# Altium PCB Drone_v1.0.PcbDoc
Units mm, origin at the board's own origin, x right, y up, seen from the top; angles counter-clockwise.
Board outline 99.06 x 99.27 mm, 2 copper layers (Top Layer, Bottom Layer); 82 components, 54 nets, 266 pads, 76 vias.
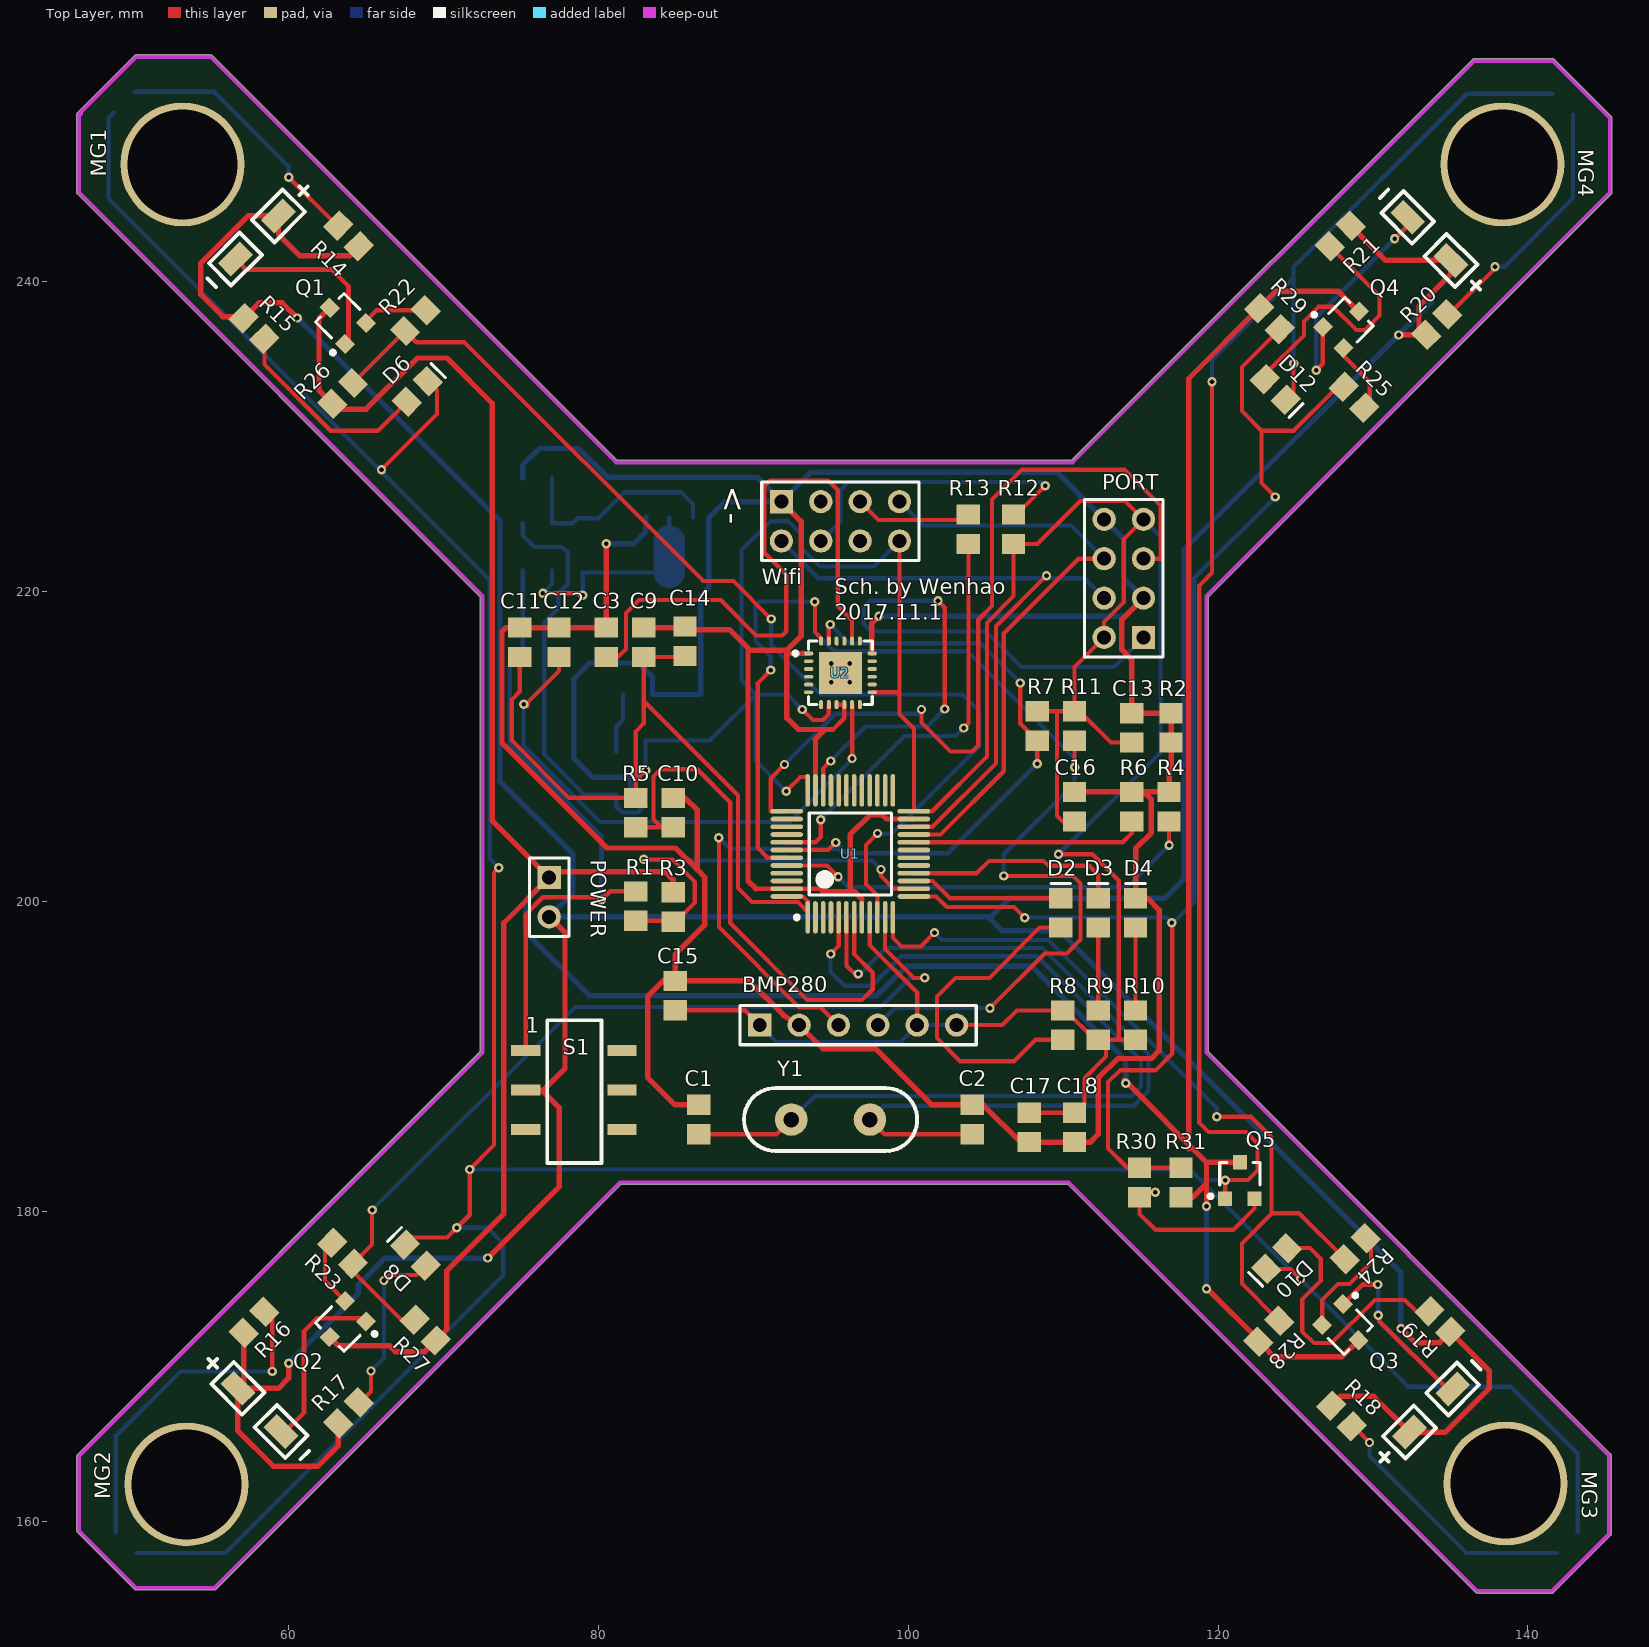
[diagram p0: Top Layer view]
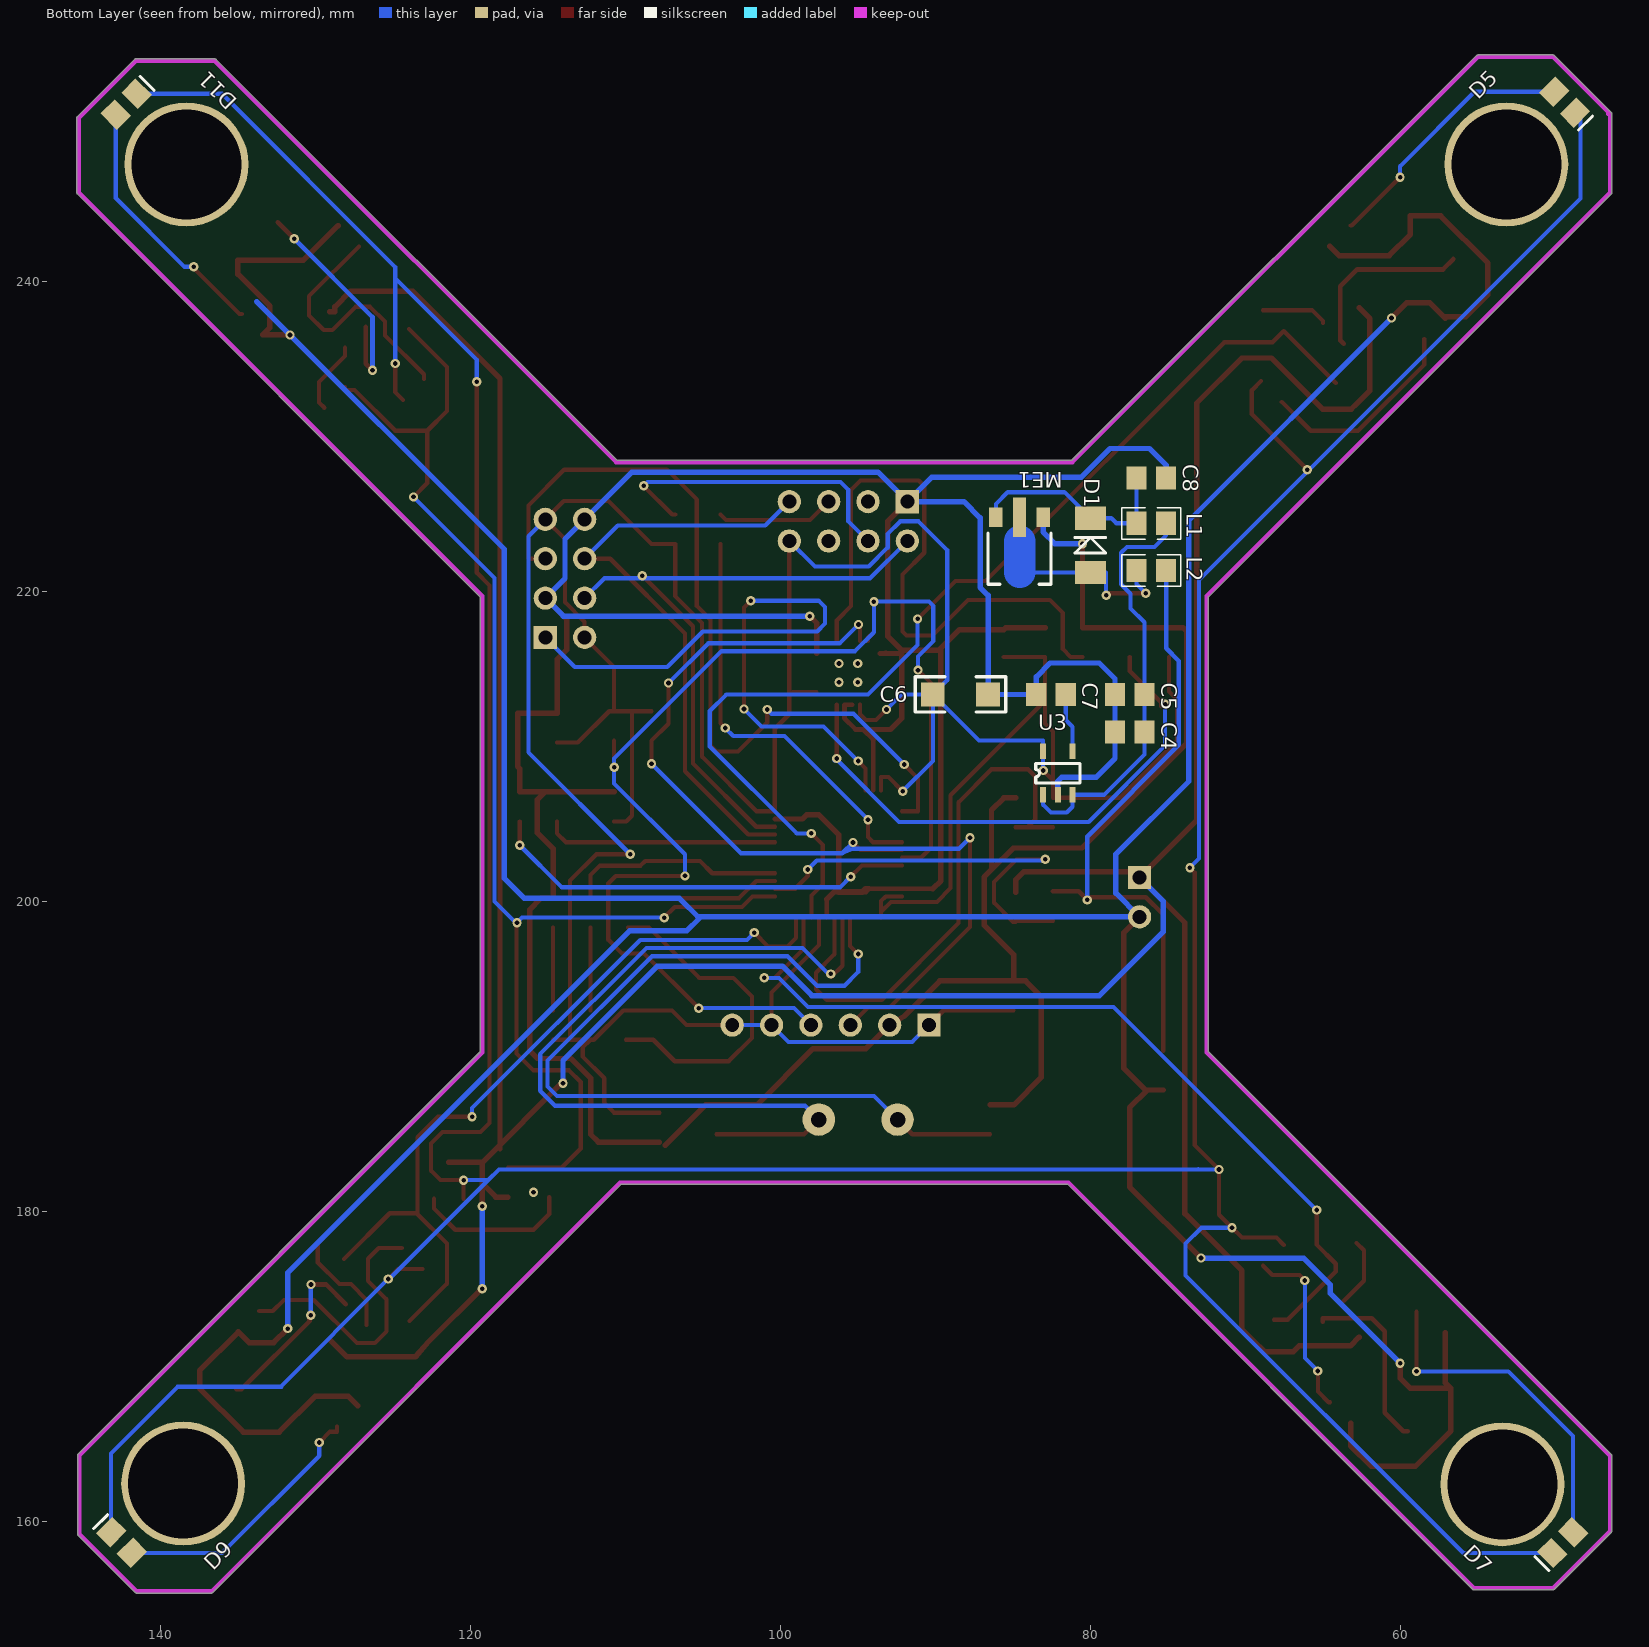
[diagram p1: Bottom Layer view, seen from below]

## Layer stack, top to bottom
Top Layer: signal copper 0.0356
Dielectric: dielectric 0.32, FR-4, Dk 4.8
Bottom Layer: signal copper 0.0356

## Board outline
50.075,155.612 46.392,159.295 46.392,159.294 cw(c46.482,159.385) 46.355,159.385 46.355,164.211 cw(c46.482,164.211) 46.392,164.302 46.392,164.301 72.39,190.299 72.39,219.657 46.392,245.655 46.392,245.654 cw(c46.482,245.745) 46.355,245.745 46.355,250.825 cw(c46.482,250.825) 46.392,250.916 46.392,250.915 50.075,254.598 50.074,254.598 cw(c50.165,254.508) 50.165,254.635 54.991,254.635 cw(c54.991,254.508) 55.082,254.598 55.081,254.598 81.206,228.473 110.564,228.473 136.435,254.344 136.434,254.344 cw(c136.525,254.254) 136.525,254.381 141.605,254.381 cw(c141.605,254.254) 141.696,254.344 141.695,254.344 145.378,250.661 145.378,250.662 cw(c145.288,250.571) 145.415,250.571 145.415,245.745 cw(c145.288,245.745) 145.378,245.654 145.378,245.655 119.38,219.657 119.38,190.299 145.332,164.347 145.331,164.348 cw(c145.242,164.257) 145.369,164.257 145.369,159.177 cw(c145.242,159.177) 145.331,159.087 145.332,159.087 141.649,155.404 141.649,155.405 cw(c141.559,155.494) 141.559,155.367 136.733,155.367 cw(c136.733,155.494) 136.635,155.413 cw(c136.716,155.512) 136.625,155.421 110.31,181.737 81.46,181.737 55.335,155.612 55.336,155.612 cw(c55.245,155.702) 55.245,155.575 50.165,155.575 cw(c50.165,155.702)

## Design rules (kind name [scope] priority, off if disabled: settings)
Clearance [All] p1: gap=0.2
PolygonConnect [All] p1: connectstyle=Relief reliefconductorwidth=0.254 reliefentries=4 polygonreliefangle="90 Angle" airgapwidth=0.254
RoutingVias [All] p1: holewidth=0.711 width=1.27 viastyle="Through Hole" minholewidth=0.711 minwidth=1.27 maxholewidth=0.711 maxwidth=1.27
SolderMaskExpansion [All] p1: expansion=0.102
Width [All] p1: maxlimit=0.4 minlimit=0.27 preferedwidth=0.27 minimp=50.000000 maximp=50.000000 favimp=50.000000
28 further rules are at their usual default settings.

## Classes and differential pairs
component class Drone_v1.0: BMP280 C1 C2 C3 C4 C5 C6 C7 C8 C9 C10 C11 C12 C13 C14 D1 D2 D3 D4 D5 D6 D7 D8 D9 D10 Header L1 L2 ME1 MG1 MG2 MG3 MG4 P1 PORT PORT1 POWER Q1 Q2 Q3 Q4 Q5 R1 R2 R3 R4 R5 R6 R7 R8 R9 R10 R11 R12 R13 R14 R15 R16 R17 R18 R19 R20 R21 R22 R23 R24 R25 R26 R27 R28 S1 U1 U2 U3 Wifi Y1

## Components (designator, comment, footprint, x,y, rotation, side; value= is the part's Value field where it differs from the comment)
BMP280 "BMP280" HDR1X6 90.424,192.024 r0 top (schematic designator P1)
C1 "0402 12pF" 0805-2 86.487,185.928 r90 top
C2 "0402 12pF" 0805-2 104.14,185.928 r270 top
C3 "0402 12pF" 0805-2 80.518,216.728 r270 top
C4 "0402 12pF" 0805-2 77.47,210.947 r0 bottom
C5 "0402 12pF" 0805-2 77.47,213.36 r0 bottom
C6 "Cap Pol" 1206 88.392,213.36 r180 bottom
C7 "0402 12pF" 0805-2 82.55,213.36 r0 bottom
C8 "0402 12pF" 0805-2 76.073,227.33 r180 bottom
C9 "0402 12pF" 0805-2 82.931,216.728 r90 top
C10 "Cap" 0805-2 84.836,205.74 r90 top
C11 "0402 12pF" 0805-2 74.93,216.728 r90 top
C12 "0402 12pF" 0805-2 77.47,216.728 r90 top
C13 "Cap" 0805-2 114.427,211.201 r270 top
C14 "Cap" 0805-2 85.598,216.789 r270 top
C15 "Cap" 0805-2 84.963,193.929 r270 top
C16 "Cap" 0805-2 110.744,206.121 r270 top
C17 "0402 12pF" 0805-2 107.823,185.42 r270 top
C18 "0402 12pF" 0805-2 110.744,185.42 r270 top
D1 "Diode" DIODE-1206 80.01,221.234 r90 bottom
D2 "LED0" LED_0805 109.855,199.263 r90 top
D3 "LED0" LED_0805 112.268,199.263 r90 top
D4 "LED0" LED_0805 114.681,199.263 r90 top
D5 "LED0" LED_0805 49.403,251.587 r225 bottom
D6 "LED0" LED_0805 68.326,232.918 r45 top
D7 "LED0" LED_0805 49.53,158.623 r315 bottom
D8 "LED0" LED_0805 68.199,177.165 r135 top
D9 "LED0" LED_0805 142.538,158.633 r45 bottom
D10 "LED0" LED_0805 123.779,176.957 r225 top
D11 "LED0" LED_0805 142.24,251.46 r135 bottom
D12 "LED0" LED_0805 123.698,233.045 r315 top
L1 "Inductor" 0805-1 76.073,224.409 r180 bottom
L2 "Inductor" 0805-1 76.073,221.361 r180 bottom
ME1 "ME2108A" SOT-89 83.058,224.79 r0 bottom
MG1 "MOTOR AC" Motor 53.975,246.761 r315 top
MG2 "MOTOR AC" Motor 54.229,163.195 r45 top
MG3 "MOTOR AC" Motor 137.749,163.241 r135 top
MG4 "MOTOR AC" Motor 137.541,246.761 r225 top
PORT "PORT" HDR2X4_CEN 115.189,217.043 r90 top (schematic designator PORT1)
POWER "Header 2" HDR1X2 76.835,201.549 r270 top (schematic designator POWER1)
Q1 "SI2302" SOT-23 63.5,237.49 r45 top
Q2 "SI2302" SOT-23 63.5,172.72 r135 top
Q3 "SI2302" SOT-23 128.224,172.512 r225 top
Q4 "SI2302" SOT-23 128.27,237.236 r315 top
Q5 "MOSFET-N" SOT-23 121.412,181.991 r0 top
R1 "Res1" 0805-2 82.423,199.705 r90 top
R2 "Res1" 0805-2 116.967,211.201 r270 top
R3 "Res1" 0805-2 84.836,199.644 r90 top
R4 "Res1" 0805-2 116.84,206.121 r270 top
R5 "Res1" 0805-2 82.423,205.74 r90 top
R6 "Res1" 0805-2 114.427,206.121 r270 top
R7 "Res1" 0805-2 108.331,211.328 r270 top
R8 "Res1" 0805-2 109.982,192.024 r90 top
R9 "Res1" 0805-2 112.268,192.024 r270 top
R10 "Res1" 0805-2 114.681,192.024 r270 top
R11 "Res1" 0805-2 110.744,211.328 r270 top
R12 "Res1" 0805-2 106.807,224.028 r270 top
R13 "Res1" 0805-2 103.886,224.028 r90 top
R14 "Res1" 0805-2 63.881,242.951 r135 top
R15 "Res1" 0805-2 57.785,236.982 r315 top
R16 "Res1" 0805-2 57.785,172.847 r45 top
R17 "Res1" 0805-2 63.881,167.005 r45 top
R18 "Res1" 0805-2 127.97,166.797 r315 top
R19 "Res1" 0805-2 134.32,172.893 r135 top
R20 "Res1" 0805-2 134.112,237.236 r45 top
R21 "Res1" 0805-2 127.889,242.951 r225 top
R22 "Res1" 0805-2 68.199,237.49 r225 top
R23 "Res1" 0805-2 63.5,177.292 r315 top
R24 "Res1" 0805-2 128.859,177.592 r225 top
R25 "Res1" 0805-2 128.778,232.537 r135 top
R26 "Res1" 0805-2 63.5,232.791 r45 top
R27 "Res1" 0805-2 68.834,172.339 r135 top
R28 "Res1" 0805-2 123.271,172.258 r45 top
R29 "Res1" 0805-2 123.317,237.617 r315 top
R30 "Res1" 0805-2 114.935,181.864 r90 top
R31 "Res1" 0805-2 117.602,181.864 r90 top
S1 "Switch" 开关 76.708,183.134 r0 top
U1 "STM32F103C" LQFP-48_M 96.266,203.073 r90 top
U2 "MPU6050" QFN50P400X400X90-24N 95.631,214.757 r0 top
U3 "MIC5219" SOT25-5 83.058,206.883 r90 bottom
Wifi "ESP03" PCBComponent_1 91.821,223.266 r0 top (schematic designator Header1)
Y1 "Micro 3215" XTAL5 92.456,185.928 r0 top

## Footprints (in the part's own frame and the unit in brackets; to place one, negate y for a bottom-side part, rotate by r counter-clockwise, add the part's x,y. Pads: shape width x height; smd on the part's side, far side on the other; paste and mask are expansions set on the pad)
0805-1 [mm] "贴片带丝印"
  rect 1.3x1.5 smd: 1(-0.95,0) 2(0.95,0)
  silkscreen extent -1.91,-1.02 1.9,1.02, body extent -1.14,-0.51 1.14,0.51, height 1
0805-2 [mm] "贴片无丝印"
  rect 1.3x1.5 smd: 1(-0.95,0) 2(0.95,0)
1206 [mil] "贴片元件"
  rect 60x60 smd: 1(-70,0) 2(70,0)
  silkscreen extent -115,-45 115,45, body extent -75,-35 75,35, height 39
DIODE-1206 [mm] "玻璃封装二极管"
  rect 1.5x2 smd: 1(0,0) 2(3.5,0)
  silkscreen extent 1.25,-1 2.25,1
HDR1X2 [mm] "Connector; Header; 2 Position"
  rect 1.5x1.5 hole 0.9: 1(0,0)
  round 1.5 hole 0.9: 2(2.54,0)
  silkscreen extent -1.27,-1.27 3.81,1.27
HDR1X6 [mm] "Connector; Header; 6 Position"
  rect 1.5x1.5 hole 0.9: 1(0,0)
  round 1.5 hole 0.9: 2(2.54,0) 3(5.08,0) 4(7.62,0) 5(10.16,0) 6(12.7,0)
  silkscreen extent -1.27,-1.27 13.97,1.27
HDR2X4_CEN [mm] "Connector; Header; 4x2 Position"
  rect 1.5x1.5 hole 0.9: 1(0,0)
  round 1.5 hole 0.9: 2(2.54,0) 3(5.08,0) 4(7.62,0) 5(0,2.54) 6(2.54,2.54) 7(5.08,2.54) 8(7.62,2.54)
  silkscreen extent -1.27,-1.27 8.89,3.81
LED_0805 [mm] "贴片二极管"
  rect 1.3x1.5 smd: 1(-0.95,0) 2(0.95,0)
  silkscreen extent 1.91,-0.63 1.91,0.64
LQFP-48_M [mm] "Thin QFP, 48-Leads, Body 7x7mm, Pitch 0.5mm, IPC Low Density"
  oval 2.1x0.3 smd: 1(-4.1,2.75) 2(-4.1,2.25) 3(-4.1,1.75) 4(-4.1,1.25) 5(-4.1,0.75) 6(-4.1,0.25) 7(-4.1,-0.25) 8(-4.1,-0.75) 9(-4.1,-1.25) 10(-4.1,-1.75) 11(-4.1,-2.25) 12(-4.1,-2.75) 25(4.1,-2.75) 26(4.1,-2.25) 27(4.1,-1.75) 28(4.1,-1.25) 29(4.1,-0.75) 30(4.1,-0.25) 31(4.1,0.25) 32(4.1,0.75) 33(4.1,1.25) 34(4.1,1.75) 35(4.1,2.25) 36(4.1,2.75)
  oval 0.3x2.1 smd: 13(-2.75,-4.1) 14(-2.25,-4.1) 15(-1.75,-4.1) 16(-1.25,-4.1) 17(-0.75,-4.1) 18(-0.25,-4.1) 19(0.25,-4.1) 20(0.75,-4.1) 21(1.25,-4.1) 22(1.75,-4.1) 23(2.25,-4.1) 24(2.75,-4.1) 37(2.75,4.1) 38(2.25,4.1) 39(1.75,4.1) 40(1.25,4.1) 41(0.75,4.1) 42(0.25,4.1) 43(-0.25,4.1) 44(-0.75,4.1) 45(-1.25,4.1) 46(-1.75,4.1) 47(-2.25,4.1) 48(-2.75,4.1)
  silkscreen extent -4.22,-2.65 2.65,3.57, body extent -3.5,-3.5 3.5,3.5, height 1.6
Motor [mm]
  round 8 hole 7.1: 0(-1.143,0)
  rect 1.2x2 smd: 1(5.588,2.032) 2(5.588,-1.905)
  silkscreen extent 4.57,-4.06 6.6,4.7
PCBComponent_1 [mm]
  rect 1.5x1.5 hole 0.9: 1(0,2.54)
  round 1.5 hole 0.9: 2(2.54,2.54) 3(5.08,2.54) 4(7.62,2.54) 5(7.62,0) 6(5.08,0) 7(2.54,0) 8(0,0)
  silkscreen extent -1.27,-1.27 8.89,3.81
QFN50P400X400X90-24N [mm] "QFN, 24-Leads, Body 4.1x4.1mm (max), Pitch 0.50mm, IPC Medium Density"
  oval 0.6x0.25 smd: 1(-2.05,1.25) 2(-2.05,0.75) 3(-2.05,0.25) 4(-2.05,-0.25) 5(-2.05,-0.75) 6(-2.05,-1.25) 13(2.05,-1.25) 14(2.05,-0.75) 15(2.05,-0.25) 16(2.05,0.25) 17(2.05,0.75) 18(2.05,1.25)
  oval 0.25x0.6 smd: 7(-1.25,-2.05) 8(-0.75,-2.05) 9(-0.25,-2.05) 10(0.25,-2.05) 11(0.75,-2.05) 12(1.25,-2.05) 19(1.25,2.05) 20(0.75,2.05) 21(0.25,2.05) 22(-0.25,2.05) 23(-0.75,2.05) 24(-1.25,2.05)
  rect 2.8x2.7 smd: 25(0,0)
  silkscreen extent -3.02,-2.05 2.05,2.05, body extent -2.05,-2.05 2.05,2.05, height 0.9
SOT25-5 [mm]
  rect 1x0.4 smd: 1(0,0) 2(0,-0.95) 3(0,-1.9) 4(2.8,-1.9) 5(2.8,0)
  silkscreen extent 0.76,-2.38 2.03,0.48
SOT-23 [mm]
  rect 0.9x0.95 smd: 1(-0.95,-1.175) 2(0.95,-1.175) 3(0,1.175)
  silkscreen extent -2.03,-1.14 1.3,1.18
SOT-89 [mil]
  rect 34x50 smd: 1(0,0) 3(120,0)
  rect 34x100 smd: 2(60,0)
  Top Layer lines w80: 60,140 60,60
  silkscreen extent -20,40 140,170
XTAL5 [mm]
  round 2.1 hole 1: 1(0,0) 2(5.08,0)
  silkscreen extent -3.05,-2.03 8.13,2.03
开关 [mm]
  rect 1.9x0.7 smd: 1(-1.397,7.239) 2(-1.397,4.699) 3(-1.397,2.159) 4(4.826,7.239) 5(4.826,4.699) 6(4.826,2.159)
  silkscreen extent 0,0 3.5,9.2

## Part data
BMP280: library part "Header 6", "Header, 6-Pin"
C1 C2 C3 C4 C5 C7 C8 C9 C11 C12 C17 C18: library part Cap, "Capacitor"
C6: "极性电解电容"
C10 C13 C14 C15 C16: "无极性电容"
D1: "二极管"
D2 D3 D4 D5 D6 D7 D8 D9 D10 D11 D12: "发光二极管"
L1 L2: "电感"
PORT: library part "Header 4X2A", "Header, 4-Pin, Dual row"
POWER: "Header, 2-Pin"
Q1 Q2 Q3 Q4: library part MOSFET-N, "N-Channel MOSFET"
Q5: "N-Channel MOSFET"
R1 R2 R3 R4 R5 R6 R7 R8 R9 R10 R11 R12 R13 R14 R15 R16 R17 R18 R19 R20 R21 R22 R23 R24 R25 R26 R27 R28 R29 R30 R31: "贴片电阻"
S1: library part 双刀双柄开关
U1: "STM32单片机48引脚"
Wifi: library part Hearder
Y1: library part XTAL, "Crystal Oscillator"

## Via types
v1: diameter 0.6, hole 0.3, Top Layer to Bottom Layer, 72 vias
v2: diameter 0.6, hole 0.3, Top Layer to Bottom Layer, tented top, 4 vias

## Nets (pads, with @x,y where several pads share a name; then routed paths per layer and width w, separated by ;. In a path a pad name is that pad's centre, name@x,y a point inside that pad or via, vN(x,y) a via of type N, cw(c..) or ccw(c..) an arc to the next point about the centre after c; other vN are vias at no path point)
3V3: BMP280.1 BMP280.5 BMP280.6 C6.1 C9.1 C11.1 C13.2 C14.2 C15.2 C16.2 C17.1 C18.1 PORT.4 PORT.5 R5.2 R7.1 R8.2 R9.2 R10.2 R11.1 R12.2 U1.1 U1.9 U1.24 U1.36 U1.48 U2.8 U2.13 U3.5 Wifi.5 | length 267.7
  Top Layer w0.27: C11.1 74.93,213.543 74.422,213.035 74.422,210.383 78.115,206.69 R5.2 82.423,207.823 ; v1(83.058,208.458) 82.423,207.823 ; C15.2 89.469,192.979 BMP280.1 ; C14.2@85.598,215.778 C9.1 82.931,212.954 ; v1(92.126,207.112) 93.04,208.026 93.516,208.026 U1.36 ; U1.48 93.218,200.323 93.516,200.025 U1.1@93.516,199.339 ; v1(93.167,212.395) 93.853,211.709 94.488,211.709 94.881,212.102 U2.8 ; U1.1 U1.1@93.516,199.339 ; U1.9 97.516,197.195 100.584,194.127 BMP280.5 ; U2.13 99.218,213.507 99.441,213.284 ; Wifi.5 99.441,213.284 ; U1.24 U1.24@100.381,205.823 ; BMP280.6 106.07,192.024 107.02,192.974 R8.2 110.16,192.974 112.06,191.074 R9.2 ; C17.1 C18.1 111.379,187.005 111.379,188.595 112.776,189.992 112.776,190.566 R9.2 ; R7.1 R11.1 ; 109.601,212.278 109.601,205.537 109.967,205.171 C16.2 ; v1(109.703,203.048) 111.887,203.048 113.589,201.346 113.589,191.074 ; C13.2 113.091,210.251 111.064,212.278 R11.1 ; R10.2 113.589,191.074 ; 82.423,207.823 82.423,210.972 82.931,211.48 82.931,212.954 ; 82.931,212.954 89.027,206.858 89.027,200.863 89.916,199.974 92.881,199.974 U1.1@93.516,199.339 ; 99.441,213.284 99.441,212.085 100.381,211.145 U1.24@100.381,205.823 ; U1.24@100.381,205.823 101.556,205.823 105.08,209.347 105.08,217.983 106.807,219.71 R12.2 108.331,223.078 111.11,225.857 113.995,225.857 PORT.4 113.919,223.393 113.919,219.319 112.649,218.049 PORT.5 110.744,215.138 R11.1 ; R9.2 113.589,191.074
  Bottom Layer w0.27: v1(83.058,208.458) U3.5 83.058,210.388 87.198,210.388 C6.1 ; BMP280.1 91.509,190.939 99.499,190.939 BMP280.5 BMP280.6 ; v1(92.126,207.112) 90.17,209.067 C6.1 ; v1(93.167,212.395) 92.202,213.36 C6.1 ; Wifi.5 97.79,221.615 94.31,221.615 93.091,222.834 93.091,223.723 92.278,224.536 91.11,224.536 89.251,222.677 89.251,214.279 C6.1 ; v1(109.703,203.048) 116.281,209.626 116.281,223.571 PORT.4
AGND: POWER.1 Q1.3 Q2.3 Q3.3 Q4.3 Q5.3 R3.2 R26.1 R27.1 R28.1 R29.1 R31.1 | length 246.6
  Top Layer w0.35: Q2.3 63.235,171.323 66.53,171.323 66.911,170.942 68.78,170.942 R27.1 70.231,172.393 70.231,176.174 73.914,179.857 73.914,198.628 POWER.1 ; Q1.3 61.976,237.628 61.976,232.972 R26.1 63.173,231.775 65.024,231.775 68.326,235.077 70.231,235.077 ; 70.294,235.013 73.152,232.156 73.152,205.232 POWER.1 ; R3.2 84.836,201.397 84.303,201.93 77.216,201.93 POWER.1 ; v1@113.948,188.471 119.253,183.166 ; R31.1 118.379,180.914 119.253,181.788 ; 118.11,184.055 118.11,233.753 R29.1 123.752,239.395 127.752,239.395 128.768,238.379 128.768,238.067 Q4.3 ; v1(119.253,180.34) 119.253,181.788 ; v1@119.28,175.033 122.726,171.586 123.578,170.607 127.98,170.607 Q3.3 ; Q5.3 119.253,183.166 ; 119.253,181.788 119.253,183.166
  Bottom Layer w0.35: POWER.1 75.311,200.025 75.311,198.044 79.426,193.929 97.979,193.929 99.884,195.834 107.95,195.834 114.046,189.738 v1(114.046,188.265) ; v1(119.253,175.006) v1(119.253,180.34)
BAT: MG1.1 MG2.1 MG3.1 MG4.1 POWER.2 R14.1 R15.1 R16.1 R17.1 R18.1 R19.1 R20.1 R21.1 S1.2 | length 294.4
  Top Layer w0.35: R16.1 57.113,168.953 MG2.1 ; R15.1 58.093,238.633 59.6,238.633 v1(60.579,237.654) ; R15.1@57.15,237.744 55.778,237.744 54.356,239.166 54.356,241.198 57.404,244.247 MG1.1 59.363,243.048 60.73,241.681 63.954,241.681 R14.1 ; v1(60.02,170.205) 60.02,169.24 59.363,168.583 MG2.1 ; R17.1 63.209,164.86 61.9,163.551 59.03,163.551 56.743,165.837 MG2.1 ; v1(72.873,176.987) 77.47,181.585 77.47,186.69 76.327,187.833 S1.2 ; 76.454,187.833 77.851,189.23 77.851,197.993 POWER.2 ; R18.1 127.896,168.067 130.049,168.067 MG3.1 134.675,165.756 137.495,168.575 137.495,169.718 R19.1 134.296,171.526 132.715,171.526 v1(131.805,172.436) ; R21.1 130.811,241.373 MG4.1 135.027,240.487 132.969,238.43 132.969,237.036 R20.1 v1(131.662,236.564)
  Bottom Layer w0.35: v1(60.02,170.205) 64.516,174.701 64.516,175.26 66.243,176.987 v1(72.873,176.987) ; v1(60.579,237.654) 73.66,224.573 73.66,207.748 78.359,203.049 78.359,200.533 POWER.2 105.337,199.009 ; v1(131.805,172.436) 131.805,176.043 109.728,198.12 106.045,198.12 105.247,198.918 106.528,200.199 116.543,200.199 117.831,201.487 117.831,222.733 133.821,238.723
GND: BMP280.2 C1.2 C2.1 C3.1 C4.2 C5.2 C6.2 C7.2 C8.2 C9.2 C10.2 C11.2 C12.2 C13.1 C14.1 C15.1 C16.1 C17.2 C18.2 D4.2 ME1.1 PORT.2 PORT.8 R2.1 R2.2 R4.1 R6.1 U1.8 U1.23 U1.35 U1.47 U2.1 U2.9 U2.10 U2.18 U3.2 Wifi.1 | length 321
  Top Layer w0.3: 90.17,200.823 U1.47 94.315,200.823 ; U1.35 94.016,210.479 ; 95.148,211.099 95.881,211.832 U2.10 U2.9 ; U1.8 97.016,200.152 ; 98.588,205.323 U1.23
  Top Layer w0.35: v1(80.518,223.088) C3.1 C12.2 C11.2 74.041,217.678 73.787,217.424 73.787,210.225 80.558,203.454 84.986,203.454 86.391,202.049 ; C9.2 C14.1@85.471,217.678 ; C10.2 85.598,206.69 86.391,205.897 86.391,202.049 ; C14.1@85.598,217.551 88.458,217.551 89.662,216.347 89.662,201.331 90.17,200.823 ; C1.2 84.953,186.878 83.185,188.646 83.185,193.878 84.186,194.879 C15.1 ; 89.789,216.22 92.192,216.22 93.091,217.119 93.091,224.536 Wifi.1 ; 92.177,216.007 U2.1 93.218,216.023 ; 92.177,216.205 92.177,211.836 92.913,211.099 94.636,211.099 ; 94.016,210.479 94.636,211.099 ; 95.148,211.099 94.636,211.099 ; 97.016,200.152 96.538,200.63 96.261,200.63 ; U2.18 97.663,216.007 97.663,217.957 v1(98.12,218.415) ; 98.588,205.323 98.323,205.588 97.536,205.588 96.261,204.313 96.261,200.63 ; C17.2@107.442,184.277 104.841,186.878 C2.1 101.524,186.878 97.902,190.5 94.488,190.5 BMP280.2 91.979,192.629 89.729,194.879 C15.1 ; C17.2 C18.2 111.76,184.47 112.268,184.978 112.268,188.595 113.538,189.865 115.697,189.865 116.205,190.373 116.205,199.466 115.458,200.213 D4.2 114.681,203.413 115.697,204.429 115.697,206.578 115.204,207.071 ; C16.1 112.573,207.071 R6.1 115.204,207.071 ; PORT.2 113.792,218.186 113.792,216.256 114.427,215.621 C13.1 115.672,212.151 R2.1 R2.2 116.967,208.712 116.84,208.585 R4.1 115.204,207.071 ; C15.1 84.963,196.571 86.868,198.476 86.868,201.572 86.391,202.049 ; 94.707,200.63 96.261,200.63 ; 94.707,200.63 94.509,200.63 94.315,200.823 94.513,200.823 94.707,200.63 ; 94.707,200.63 94.727,200.609 96.241,200.609 96.261,200.63
  Bottom Layer w0.35: C8.2 75.123,228.158 76.2,229.235 78.74,229.235 80.594,227.381 90.246,227.381 Wifi.1 ; v1(80.518,223.088) 82.296,223.088 83.058,223.85 ME1.1 ; U3.2 82.108,207.772 81.854,208.026 79.629,208.026 78.42,209.235 C4.2 C5.2 78.42,214.376 79.436,215.392 82.601,215.392 83.5,214.493 C7.2 C6.2 86.614,219.761 87.122,220.269 87.122,224.765 88.163,225.806 Wifi.1 ; v1(98.12,218.415) 114.021,218.415 PORT.2 113.919,220.853 113.919,223.393 PORT.8 109.601,227.711 93.726,227.711 Wifi.1
KEY: R13.1 U1.41 | length 27.1
  Top Layer w0.27: U1.41 94.031,203.823 94.361,204.153 v1(94.361,205.283) ; v1(103.581,211.201) 103.886,211.506 R13.1
  Bottom Layer w0.27: v1(94.361,205.283) 99.754,210.675 103.056,210.675 v1(103.581,211.201)
LED1: D2.2 U1.15 | length 9.9
  Top Layer w0.27: U1.15 101.572,201.323 102.682,200.213 D2.2
LED2: D3.2 U1.16 | length 14.1
  Top Layer w0.27: U1.16 104.414,201.823 105.212,202.621 108.74,202.621 109.05,202.311 111.658,202.311 112.268,201.701 D3.2
LED_EN: U1.45
NetC3_2: C3.2 U2.20 | length 40.8
  Top Layer w0.27: C3.2 81.28,215.778 81.788,216.286 81.788,218.618 82.626,219.456 87.905,219.456 90.191,217.17 91.877,217.17 92.131,217.424 92.131,221.102 90.729,222.504 90.729,226.822 91.084,227.178 94.844,227.178 95.453,226.568 95.453,219.063 96.381,218.135 U2.20
NetC4_1: C4.1 C5.1 L1.2 U3.1 U3.3 | length 27.2
  Bottom Layer w0.27: L1.2 75.123,223.632 75.87,222.885 77.648,222.885 78.029,222.504 78.029,220.472 77.419,219.862 77.419,218.918 76.52,218.019 C5.1 C4.1 76.52,209.484 79.121,206.883 U3.3 81.158,206.116 81.534,205.74 82.55,205.74 83.058,206.248 U3.1
NetC7_1: C7.1 U3.4 | length 3.9
  Bottom Layer w0.27: U3.4 81.158,211.277 81.6,211.719 C7.1
NetC8_1: C8.1 D1.2 L1.1 ME1.3 | length 14
  Bottom Layer w0.27: C8.1 L1.1 78.334,224.409 78.659,224.734 D1.2 81.692,226.416 85.344,226.416 86.106,225.654 ME1.3
NetC12_1: C12.1 U2.11 | length 35.2
  Top Layer w0.27: v1@75.438,212.598 75.438,212.852 77.47,214.884 C12.1
  Top Layer w0.3: v1(96.381,209.232) U2.11
  Bottom Layer w0.27: v1@75.032,212.725 75.184,212.573 75.184,210.058 80.112,205.13 92.354,205.13 96.317,209.093 v1@96.52,209.093
  other v1: 75.184,212.725
NetD1_1: D1.1 L2.1 ME1.2 | length 12.9
  Top Layer w0.27: v1(76.429,219.888) 78.867,219.888 v1(78.994,219.761)
  Bottom Layer w0.27: v1(76.429,219.888) 77.023,220.482 L2.1 ; v1(78.994,219.761) 78.994,221.234 D1.1 84.582,221.234 ; 84.582,223.266 ME1.2
NetD2_1: D2.1 R8.1 | length 21.9
  Top Layer w0.27: D2.1 108.488,198.313 105.247,195.072 103.053,195.072 101.854,193.873 101.854,191.186 103.353,189.687 106.832,189.687 108.219,191.074 R8.1
NetD3_1: D3.1 R9.1 | length 5.3
  Top Layer w0.27: R9.1 D3.1
NetD4_1: D4.1 R10.1 | length 5.3
  Top Layer w0.27: R10.1 D4.1
NetD5_1: D5.1 R14.2 | length 17.1
  Top Layer w0.27: v1(60.02,246.741) 63.139,243.623 R14.2
  Bottom Layer w0.27: D5.1 55.208,252.259 60.02,247.447 v1(60.02,246.741)
NetD5_2: D5.2 D6.2 D7.2 D8.2 D9.2 D10.2 D11.2 D12.2 Q5.1 | length 316.6
  Top Layer w0.27: v1(66.011,227.872) 69.596,231.457 69.596,232.992 D6.2 ; D8.2 67.998,178.308 70.231,178.308 v1(70.866,178.943) 71.704,179.781 v1(71.704,182.702) 73.279,184.277 73.279,201.879 v1(73.585,202.185) ; v1(119.609,233.553) 119.609,221.213 118.791,220.396 118.791,185.704 119.38,185.115 121.818,185.115 122.555,184.379 122.555,182.626 121.945,182.016 v1(120.462,182.016) Q5.1 ; D10.2 124.679,176.285 v1(125.328,175.636) ; D12.2 124.878,232.881 v1(124.878,234.722)
  Bottom Layer w0.27: D5.2 48.387,250.571 48.387,245.364 73,220.751 73,202.77 v1(73.585,202.185) ; D7.2 55.945,157.951 73.863,175.87 73.863,177.927 72.847,178.943 v1(70.866,178.943) ; v1(71.704,182.702) 73.025,182.702 ; 73.05,182.728 73.025,182.702 ; v1(119.609,233.553) 119.609,234.959 124.878,240.228 ; v1(120.462,182.016) 118.872,182.016 ; v1(124.878,234.722) 124.878,240.956 136.054,252.132 D11.2 ; v1@125.29,175.598 118.872,182.016 ; v1(125.328,175.636) 132.288,168.677 ; 132.212,168.677 132.288,168.677 ; D9.2 143.21,164.384 138.917,168.677 132.288,168.677 ; 73.025,182.702 118.186,182.702 118.872,182.016
NetD6_1: D6.1 R15.2 | length 13.4
  Top Layer w0.27: R15.2 58.457,234.659 62.738,230.378 65.786,230.378 D6.1
NetD7_1: D7.1 R16.2 | length 21.9
  Top Layer w0.27: v1(58.965,169.672) R16.2@58.965,173.519
  Bottom Layer w0.27: D7.1 48.858,165.495 53.035,169.672 v1(58.965,169.672)
NetD8_1: D8.1 R17.2 | length 11.7
  Top Layer w0.27: R17.2 64.623,167.677 65.329,168.382 v1(65.329,169.697) ; v1(66.167,175.539) 66.523,175.895 68.273,175.895 D8.1
  Bottom Layer w0.27: v1(65.329,169.697) 66.167,170.536 v1(66.167,175.539)
NetD9_1: D9.1 R18.2 | length 17.3
  Top Layer w0.27: R18.2 128.642,165.781 129.078,165.781 v1(129.773,165.086)
  Bottom Layer w0.27: v1(129.773,165.086) 129.773,164.232 136.044,157.961 D9.1
NetD10_1: D10.1 R19.2 | length 17.6
  Top Layer w0.27: D10.1 125.938,177.629 126.624,176.943 126.624,175.519 125.43,174.325 125.43,172.258 126.192,171.496 127.335,171.496 130.129,174.29 132.05,174.29 132.775,173.565 R19.2
NetD11_1: D11.1 R20.2 | length 16.7
  Top Layer w0.27: R20.2 134.925,237.908 137.871,240.854 v1(137.871,240.961)
  Bottom Layer w0.27: v1(137.871,240.961) 138.472,240.961 142.912,245.401 D11.1
NetD12_1: D12.1 R21.2 | length 16.8
  Top Layer w0.27: D12.1 123.026,234.024 125.539,236.537 125.539,237.427 126.492,238.379 127.435,238.379 128.933,236.88 129.489,236.88 130.429,237.82 130.429,239.068 R21.2
NetHeader1_3: R13.2 Wifi.3 | length 7.6
  Top Layer w0.27: Wifi.3 98.095,224.612 103.52,224.612 R13.2
NetHeader1_7: R12.1 Wifi.7 | length 20.1
  Top Layer w0.27: R12.1 106.995,224.978 v1(108.839,226.822)
  Bottom Layer w0.27: Wifi.7 95.631,224.536 95.631,226.568 96.139,227.076 108.585,227.076 v1(108.839,226.822)
NetMG1_2: MG1.2 Q1.1 | length 11.8
  Top Layer w0.3: MG1.2 57.25,240.792 62.796,240.792 63.881,239.707 63.881,236.209 Q1.1
NetMG2_2: MG2.2 Q2.1 | length 11.8
  Top Layer w0.3: MG2.2 59.81,165.799 61.011,167 61.011,172.263 61.849,173.101 65.003,173.101 Q2.1
NetMG3_2: MG3.2 Q3.1 | length 11.7
  Top Layer w0.3: Q3.1 129.331,175.281 v1(130.307,175.281) ; v1(130.332,173.3) 130.408,173.223 130.408,172.914 134.782,168.54 MG3.2
  Bottom Layer w0.3: v1(130.307,175.281) 130.332,175.255 v1(130.332,173.3)
NetMG4_2: MG4.2 Q4.1 | length 15.1
  Top Layer w0.3: v1(126.34,234.286) 126.767,234.713 Q4.1 ; v1(131.394,242.773) MG4.2@132.461,243.84
  Bottom Layer w0.3: v1(126.34,234.286) 126.34,237.719 v1(131.394,242.773)
NetQ1_2: Q1.2 R22.1 | length 4.3
  Top Layer w0.27: Q1.2 65.003,237.463 65.701,238.162 R22.1
NetQ2_2: Q2.2 R23.1 | length 4.5
  Top Layer w0.27: R23.1 62.357,177.492 62.357,175.525 Q2.2
NetQ3_2: Q3.2 R24.1 | length 7.5
  Top Layer w0.27: Q3.2 126.721,174.29 127.737,175.306 128.478,175.306 129.875,176.703 129.875,177.92 R24.1
NetQ4_2: Q4.2 R25.1 | length 4.7
  Top Layer w0.27: Q4.2 128.111,235.204 129.794,233.521 129.794,232.21 R25.1
NetQ5_2: Q5.2 R30.1 | length 10.1
  Top Layer w0.27: R30.1 114.935,179.832 115.951,178.816 120.997,178.816 122.362,180.181 Q5.2
  other v1: 115.951,181.229
NetR1_1: R1.1 R3.1 U1.14 | length 28
  Top Layer w0.27: R1.1 R3.1@84.836,198.755 ; v1(82.931,202.717) 84.783,202.717 86.233,201.267 86.233,199.923 85.004,198.694 R3.1 ; v1(98.247,202.062) 98.247,201.636 99.06,200.823 U1.14
  Bottom Layer w0.27: v1(82.931,202.717) 83.008,202.64 97.669,202.64 v1(98.247,202.062)
NetR4_2: R4.2 U1.44 | length 27.9
  Top Layer w0.27: U1.44 94.755,202.323 v1(95.479,201.6) ; v1(116.84,203.632) R4.2
  Bottom Layer w0.27: v1(95.479,201.6) 96.164,200.914 114.122,200.914 v1(116.84,203.632)
NetR6_2: R6.2 U1.20 | length 15.1
  Top Layer w0.27: U1.20 113.851,203.823 114.427,204.399 R6.2
OSC1: C1.1 U1.5 Y1.1 | length 59.2
  Top Layer w0.27: C1.1 91.506,184.978 Y1.1 ; v1(94.996,196.613) 95.516,197.133 U1.5
  Bottom Layer w0.27: Y1.1 93.98,187.452 114.427,187.452 115.037,188.062 115.037,189.738 108.306,196.469 99.554,196.469 97.649,194.564 95.885,194.564 94.996,195.453 v1(94.996,196.613)
OSC2: C2.2 U1.6 Y1.2 | length 54.9
  Top Layer w0.27: U1.6 96.016,195.855 96.723,195.148 96.774,195.199 v1(96.774,195.326) ; Y1.2 98.486,184.978 C2.2
  Bottom Layer w0.27: v1(96.774,195.326) 96.774,195.199 98.582,197.007 108.659,197.007 115.519,190.147 115.519,187.782 114.554,186.817 98.425,186.817 Y1.2
PWM1: R22.2 R26.2 U1.10 | length 70.1
  Top Layer w0.27: R26.2 R22.2 68.253,236.093 71.363,236.093 ; 71.368,236.087 86.78,220.675 88.722,220.675 v1(91.161,218.237) ; U1.10 98.016,200.378 97.277,201.117 97.277,203.652 v1(98.019,204.394)
  Bottom Layer w0.27: v1(91.161,218.237) 91.161,216.56 94.361,213.36 103.505,213.36 104.572,212.293 104.572,210.012 98.954,204.394 v1(98.019,204.394)
PWM2: R23.2 R27.2 U1.11 | length 57
  Top Layer w0.27: v1(65.405,180.086) 65.405,177.854 R23.2 64.172,176.112 67.273,173.011 R27.2 ; U1.11 98.516,196.939 100.383,195.072 v1(101.067,195.072)
  Bottom Layer w0.27: v1(65.405,180.086) 78.519,193.2 98.23,193.2 100.101,195.072 v1(101.067,195.072)
PWM3: R24.2 R28.2 U1.12 | length 51.8
  Top Layer w0.27: U1.12 99.016,197.656 99.568,197.104 100.813,197.104 v1(101.702,197.993) ; v1(119.913,186.106) 122.123,186.106 123.444,184.785 123.444,179.832 ; R28.2 121.539,175.334 121.539,177.927 123.49,179.878 125.229,179.878 R24.2
  Bottom Layer w0.27: v1(101.702,197.993) 102.176,197.518 109.06,197.518 119.913,186.665 v1(119.913,186.106)
PWM4: R25.2 R29.2 R30.2 R31.2 U1.13 | length 89.8
  Top Layer w0.27: U1.13 101.81,200.323 102.489,199.644 106.832,199.644 v1(107.518,198.958) ; v1(117.018,198.628) 117.043,198.603 117.043,190.195 115.951,189.103 113.665,189.103 112.903,188.341 112.903,184.048 114.137,182.814 R30.2 R31.2 ; v1(123.698,226.111) 122.809,227 122.809,230.378 ; R29.2 121.539,234.496 121.539,231.648 122.809,230.378 ; R25.2 128.106,233.02 127.508,233.02 124.866,230.378 122.809,230.378
  Bottom Layer w0.27: v1(107.518,198.958) 116.688,198.958 v1(117.018,198.628) ; v1@117.056,198.59 118.466,200 118.466,220.878 v1(123.698,226.111)
RST: C10.1 R5.1 U1.7 | length 36.4
  Top Layer w0.27: R5.1 84.074,204.79 ; C10.1 84.074,204.79 ; U1.7 96.516,196.6 97.714,195.402 97.714,194.335 97.028,193.65 93.472,193.65 88.519,198.603 88.519,206.4 86.385,208.534 84.032,208.534 83.566,208.068 83.566,205.298 84.074,204.79
SCL: BMP280.3 R7.2 U1.42 U2.23 | length 64.4
  Top Layer w0.27: v1(87.782,204.114) 87.782,198.349 92.964,193.167 94.361,193.167 BMP280.3 ; U1.42 94.84,203.323 v1(95.326,203.81) ; U2.23 94.881,217.792 v1(94.971,217.881) ; v1(107.239,214.097) 107.239,211.47 R7.2 v1(108.331,208.89)
  Bottom Layer w0.27: v1(87.782,204.114) 88.494,203.403 95.326,203.403 96.022,203.114 ; v1(94.971,217.881) 96.19,216.662 104.673,216.662 v1(107.239,214.097) ; v1(95.326,203.81) 96.022,203.114 ; v1(108.331,208.89) 102.555,203.114 96.022,203.114
SDA: BMP280.4 R11.2 U1.43 U2.24 | length 82.6
  Top Layer w0.27: v1(91.135,214.935) 90.297,214.097 90.297,203.458 90.932,202.823 U1.43 ; v1(93.98,219.354) 93.98,217.393 94.381,216.992 U2.24 ; v1(105.283,193.116) 108.814,196.647 110.236,196.647 111.125,197.536 111.125,201.168 110.642,201.651 v1(106.172,201.651) ; v1(110.744,208.661) R11.2
  Bottom Layer w0.27: v1(91.135,214.935) 91.135,215.815 90.145,216.806 90.145,219.075 90.424,219.354 v1(93.98,219.354) 93.98,217.375 95.201,216.154 103.81,216.154 110.744,209.22 v1(110.744,208.661) 110.744,207.62 106.172,203.048 v1(106.172,201.651) ; BMP280.4 99.136,193.116 v1(105.283,193.116)
SWCLK: PORT.3 U1.37 | length 53.6
  Top Layer w0.27: v1(92.024,208.839) 91.135,207.95 91.135,205.823 U1.37 ; v1(100.863,212.395) 100.863,211.557 102.743,209.677 104.14,209.677 104.521,210.058 104.521,218.186 105.41,219.075 105.41,225.933 107.345,227.868 113.965,227.868 116.281,225.552 116.281,222.123 PORT.3
  Bottom Layer w0.27: v1(92.024,208.839) 95.301,212.115 100.584,212.115 v1(100.863,212.395)
SWDIO: PORT.1 U1.34 | length 44.1
  Top Layer w0.27: U1.34 94.516,208.587 v1(94.996,209.067) ; v1(101.93,219.405) 102.362,218.973 v1(102.362,212.42)
  Bottom Layer w0.27: v1(94.996,209.067) 97.231,211.303 101.244,211.303 v1(102.362,212.42) ; v1(101.93,219.405) 97.536,219.405 97.13,218.999 97.13,217.932 97.638,217.424 105.029,217.424 107.315,215.138 113.284,215.138 PORT.1
USART3_RX: PORT.6 U1.22 Wifi.8 | length 43
  Top Layer w0.27: U1.22 101.572,204.823 105.664,208.915 105.664,217.767 v1(108.928,221.031)
  Bottom Layer w0.27: Wifi.8 94.223,220.864 v1@108.928,220.864 ; v1(108.928,221.031) v1@108.928,220.864 ; PORT.6 111.368,220.864 v1@108.928,220.864
USART3_TX: PORT.7 U1.21 Wifi.4 | length 39.6
  Top Layer w0.27: U1.21 102.088,204.323 106.172,208.407 106.172,217.297 110.998,222.123 PORT.7
  Bottom Layer w0.27: Wifi.4 100.99,224.257 110.515,224.257 PORT.7
VCC: L2.2 R1.2 S1.1 | length 40.7
  Top Layer w0.3: S1.1 75.311,199.161 76.429,200.279 80.035,200.279 v1(80.213,200.101) 80.767,200.655 R1.2
  Bottom Layer w0.3: L2.2 75.123,216.347 74.295,215.519 74.295,210.109 80.213,204.191 v1(80.213,200.101)
pads on no net: MG1.0 MG2.0 MG3.0 MG4.0 S1.3 S1.4 S1.5 S1.6 U1.2 U1.3 U1.4 U1.17 U1.18 U1.19 U1.25 U1.26 U1.27 U1.28 U1.29 U1.30 U1.31 U1.32 U1.33 U1.38 U1.39 U1.40 U1.46 U2.2 U2.3 U2.4 U2.5 U2.6 U2.7 U2.12 U2.14 U2.15 U2.16 U2.17 U2.19 U2.21 U2.22 U2.25 Wifi.2 Wifi.6
copper on no net:
  other v2: 95.031,214.157 96.231,214.157 95.031,215.357 96.231,215.357

## Keep-outs
Keep-Out Layer:
  lines w0.254: 46.609,250.825 46.482,250.825 ; 136.716,155.512 110.363,181.864 81.407,181.864 55.245,155.702 50.165,155.702 46.482,159.385 46.482,164.211 72.517,190.246 72.517,219.71 46.482,245.745 46.482,250.825 ; 136.733,155.494 141.559,155.494 145.242,159.177 145.242,164.257 119.253,190.246 119.253,219.71 145.288,245.745 145.288,250.571 141.605,254.254 136.525,254.254 110.617,228.346 81.153,228.346 54.991,254.508 50.165,254.508 46.482,250.825

## Silkscreen, mask and mechanical layers (free items; w line width, h text height)
Top Overlay:
  text "<-" at 88.011,226.822 h1.52 r270
  text "Sch. by Wenhao" at 95.25,219.837 h1
  text "2017.11.1" at 95.25,218.186 h1

## Text inside footprints (layer, text, board x,y; h text height)
S1: Top Overlay "1" at 75.311,191.516 h1